# Altium PCB PCB1.PcbDoc
Units mil, origin at the board's own origin, x right, y up, seen from the top; angles counter-clockwise.
Board outline 4500 x 2600 mil, 2 copper layers (Top Layer, Bottom Layer), stack 60.4 mil thick; 4 components, 0 nets, 14 pads, 0 vias.
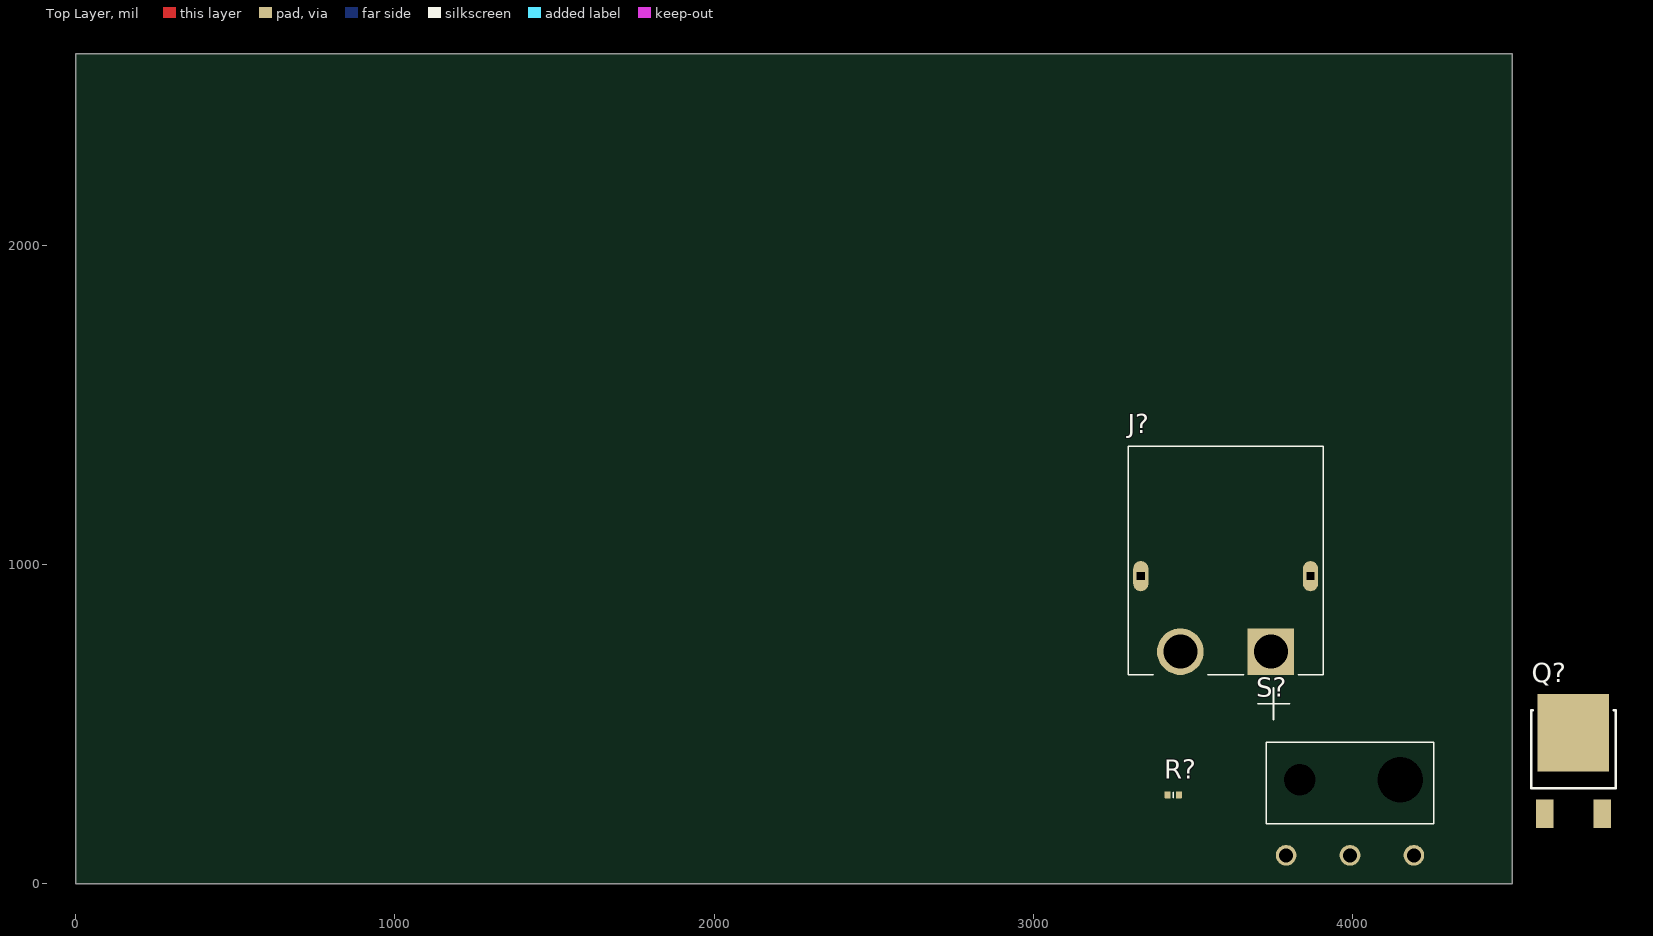
[diagram p0: Top Layer view]
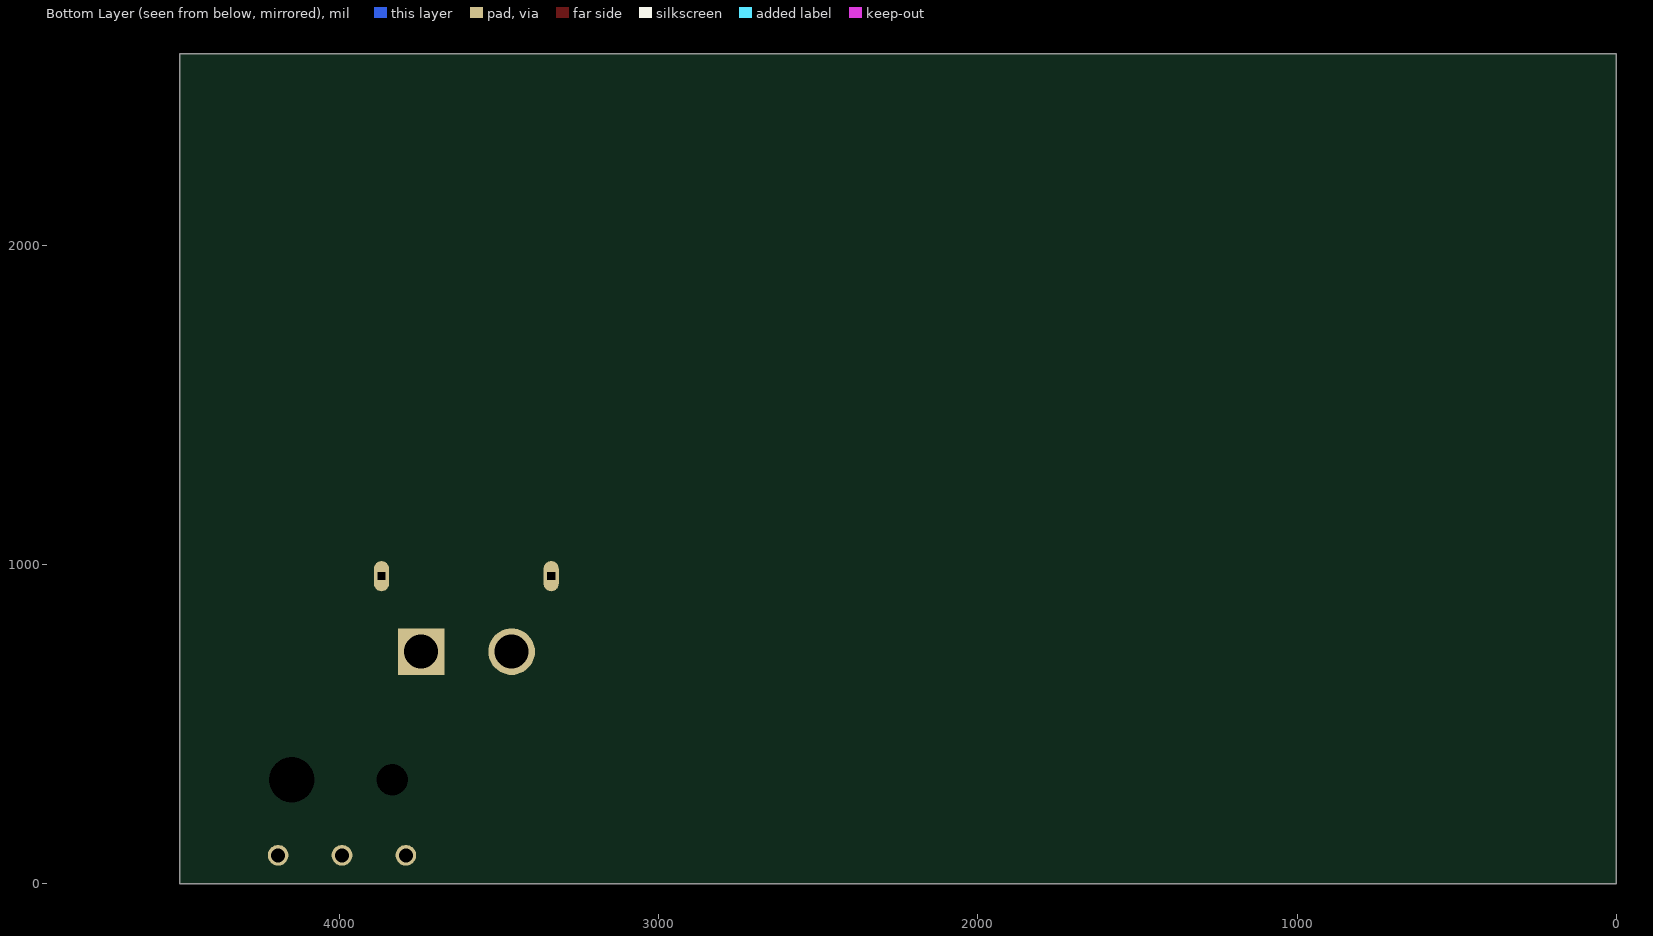
[diagram p1: Bottom Layer view, seen from below]

## Layer stack, top to bottom
Top Solder: solder mask 0.5, Solder Resist, Dk 3.3
Top Layer: signal copper 0.7
Dielectric1: core 59, FR-4, Dk 4.3
Bottom Layer: signal copper 0.7
Bottom Solder: solder mask 0.5, Solder Resist, Dk 3.3

## Board outline
0,0 4500,0 4500,2600 0,2600

## Design rules (kind name [scope] priority, off if disabled: settings)
Clearance [All] p1: gap=10 ignorepadtopadclearanceinfootprint=FALSE
DiffPairsRouting [All] p1: maxlimit=10 minlimit=10 mostfreqgap=10 toplayer_minwidth=10 toplayer_maxwidth=10 toplayer_prefwidth=10 bottomlayer_minwidth=10 bottomlayer_maxwidth=10 bottomlayer_prefwidth=10 maxuncoupledlength=500
HoleSize [All] p1: absolutevalues=TRUE maxlimit=300 minlimit=10 maxpercent=80.000 minpercent=20.000
MinimumAnnularRing [All] p1: minimumring=10
PasteMaskExpansion [All] p1: expansion=10
PlaneClearance [All] p1: clearance=15
PlaneConnect [All] p1: pad.planeconnectstyle=Relief pad.reliefexpansion=20 pad.reliefentries=4 pad.reliefconductorwidth=10 pad.reliefairgap=10 via.planeconnectstyle=Direct via.reliefexpansion=20 via.reliefentries=4 via.reliefconductorwidth=10 via.reliefairgap=10
PolygonConnect [All] p1: thpad.connectstyle=Relief thpad.reliefconductorwidth=10 thpad.reliefentries=4 thpad.polygonreliefangle="90 Angle" thpad.airgapwidth=10 smdpad.connectstyle=Relief smdpad.reliefconductorwidth=10 smdpad.reliefentries=4 smdpad.polygonreliefangle="90 Angle" smdpad.airgapwidth=10 via.connectstyle=Direct via.reliefconductorwidth=10 via.reliefentries=4 via.polygonreliefangle="90 Angle" via.airgapwidth=10
RoomDefinition Sheet1 [InComponentClass('Sheet1')] p1: confinementstyle=ConfineIn formatcopy=TRUE lockcomponents=FALSE outline 4545,55 5578,55 5578,1037 4545,1037
RoutingVias [All] p1: holewidth=10 width=20 viastyle="Through Hole" minholewidth=10 minwidth=20 maxholewidth=10 maxwidth=20
SMDNeckDown [All] p1: percent=100.000
SilkToSolderMaskClearance SilkscreenOverComponentPads [IsPad] p1: minsilkscreentomaskgap=10 clearancetoexposedcopper=TRUE
SolderMaskExpansion [All] p1: expansion=10 istentingtop=FALSE
Width [All] p1: maxlimit=10 minlimit=10 preferedwidth=10
24 further rules are at their usual default settings.

## Components (designator, comment, footprint, x,y, rotation, side; value= is the part's Value field where it differs from the comment)
J? "XT60PW-M" AMASS_XT60PW-M 3602,963 r0 top
Q? "IRFR9024PBF" FP-E22-0399-N-MFG 4691,421 r0 top
R? "Resistor 10K  +/-1 % 0402 63 mW" RESC0402(1005)_L 3438,278 r0 top value=10k
S? "D2HW-BR211DR" D2HWBR211DR 3791.52,88.78 r0 top

## Footprints (in the part's own frame and the unit in brackets; to place one, negate y for a bottom-side part, rotate by r counter-clockwise, add the part's x,y. Pads: shape width x height; smd on the part's side, far side on the other; paste and mask are expansions set on the pad)
AMASS_XT60PW-M [mm]
  rect 3.716x3.716 hole 2.7: 1(3.6,-6)
  round 3.716 hole 2.7: 2(-3.6,-6)
  oval 1.2x2.4 hole 0.6 square: S1(6.75,0) S2(-6.75,0)
  silkscreen extent -7.75,-11.43 7.75,10.35, body extent -7.75,-7.87 7.75,10.33, height 9.28
D2HWBR211DR [mm]
  round 1.65 hole 1.1: 1(0,0) 2(10.16,0) 3(5.08,0)
  round 1.25 hole 2.5 unplated: 4(1.08,6)
  round 1.803 hole 3.607 unplated: 5(9.08,6)
  silkscreen extent -1.57,2.5 11.73,9
FP-E22-0399-N-MFG [mil]
  rect 55x90 smd paste+0 mask+0: 1(-90.16,-202.11) 3(90.16,-202.11)
  rect 224.02x243.31 smd paste+0 mask+0: 4(0,51.24)
  silkscreen extent -132,-122 132,122, body extent -136,-251 136,177, height 10
RESC0402(1005)_L [mm] "Chip Resistor, Body 1.0x0.5mm, IPC High Density"
  rrect25% 0.5x0.55 smd: 1(-0.45,0) 2(0.45,0)
  silkscreen extent 0,-0.2 0,0.2, body extent -0.5,-0.25 0.5,0.25, height 0.3

## Part data
J?: library part CMP-025-000000-2, Package=None, Availability=Unavailable, Component Type=Standard, Design Item ID=XT60PW-M, MP=XT60PW-M, Pin Count=2, Price=None, Source=XT60PW-M.SchLib
Q?: library part CMP-02550-000303-1, "MOSFET P-CH 60V 8.8A DPAK", Case/Package=DPAK, Continuous Drain Current (ID)=8.8A, Current Rating=-8.8A, Drain to Source Breakdown Voltage=-60V, Drain to Source Resistance=280mR, Drain to Source Voltage (Vdss)=60V, Gate to Source Voltage (Vgs)=20V, Input Capacitance=570pF, Max Operating Temperature=150°C, Max Power Dissipation=2.5W, Min Operating Temperature=-55°C, Package Quantity=3000, Threshold Voltage=-4V, Drain-source On Resistance-Max=280mR, Element Configuration=Single, Fall Time=29ns, Height=2.39mm, Lead Free="Lead Free", Length=6.73mm, Mount="Surface Mount", Number of Channels=1, Number of Elements=1, Number of Pins=3, On-State Resistance=280mR, Packaging=Rail/Tube, Polarity=P-CHANNEL, Polarization=P, Power Dissipation=2.5W, Radiation Hardening=No, Rds On Max=280mR, Recovery Time=200ns, Rise Time=68ns, RoHS Compliant=Yes, Series=IRF/SIHFx9024, Turn-Off Delay Time=15ns, Turn-On Delay Time=13ns, Voltage Rating (DC)=-60V, Weight=0.050717oz, Width=6.22mm
R?: library part CMP-009-00149-3, "Chip Resistor, 10 kOhms, +/-1 %, 63 mW, -55 to 125 degC, 0402", Case/Package=0402, Max Operating Temperature=155°C, Min Operating Temperature=-55°C, Power=63mW, Tolerance=1%, Pins=2
S?: "Switch", Manufacturer_Name="Omron Electronics", Mouser Part Number=653-D2HW-BR211DR, Datasheet Link=https://omronfs.omron.com/en_US/ecb/products/pdf/en-d2hw.pdf, Height=5.3mm, Manufacturer_Part_Number=D2HW-BR211DR, Mouser Price/Stock=https://www.mouser.com/Search/Refine.aspx?Keyword=653-D2HW-BR211DR

## Nets (pads, with @x,y where several pads share a name; then routed paths per layer and width w, separated by ;. In a path a pad name is that pad's centre, name@x,y a point inside that pad or via, vN(x,y) a via of type N, cw(c..) or ccw(c..) an arc to the next point about the centre after c; other vN are vias at no path point)
pads on no net: J?.1 J?.2 J?.S1 J?.S2 Q?.1 Q?.3 Q?.4 R?.1 R?.2 S?.1 S?.2 S?.3 S?.4 S?.5